# Allegro board D1S_NEFU_V1_0.brd
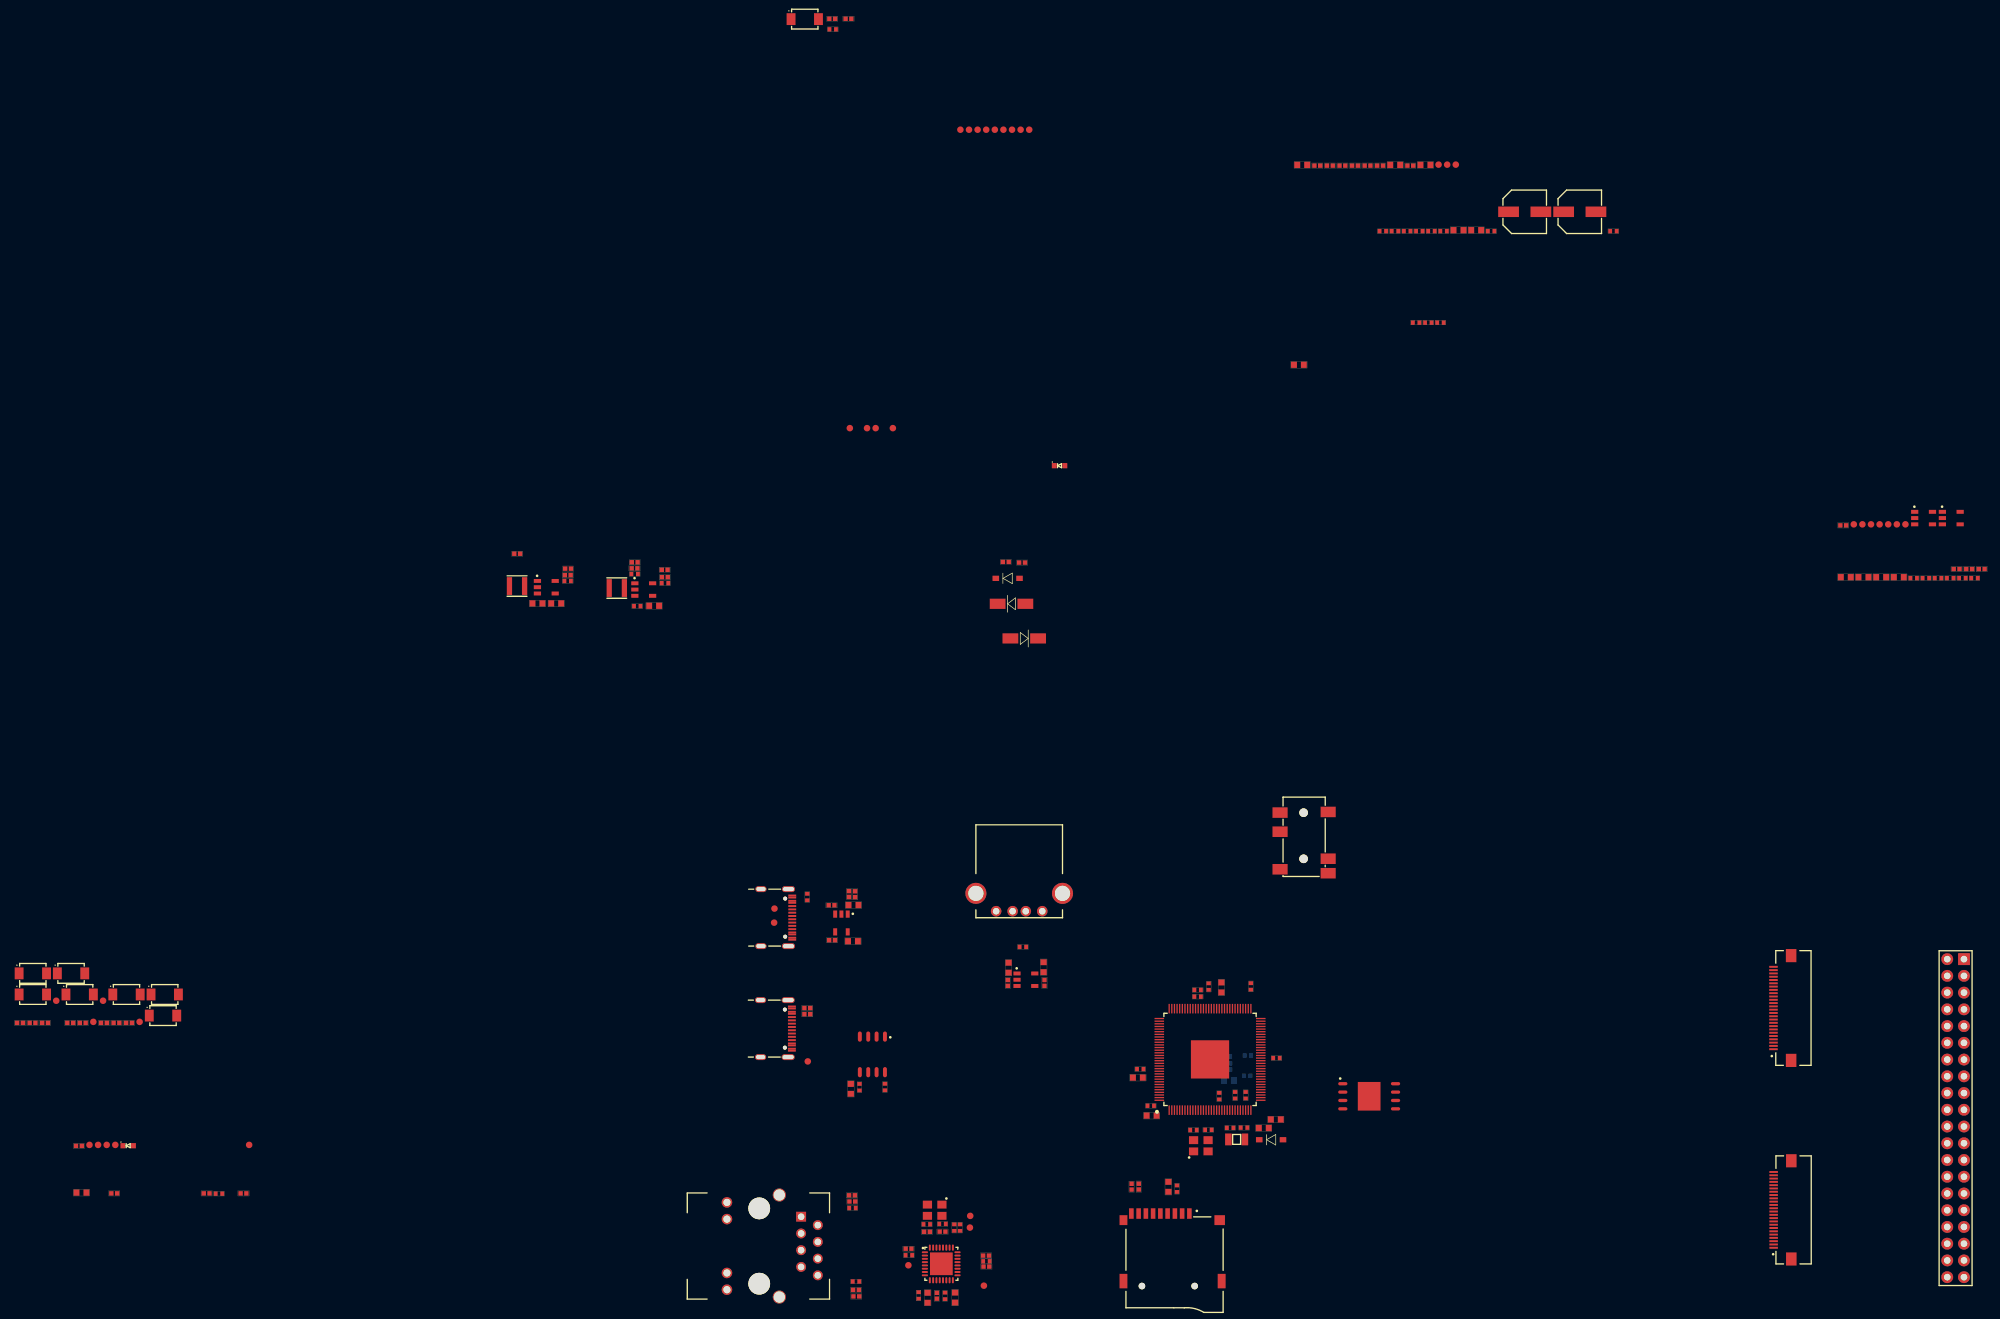
[diagram p0: board, top side]
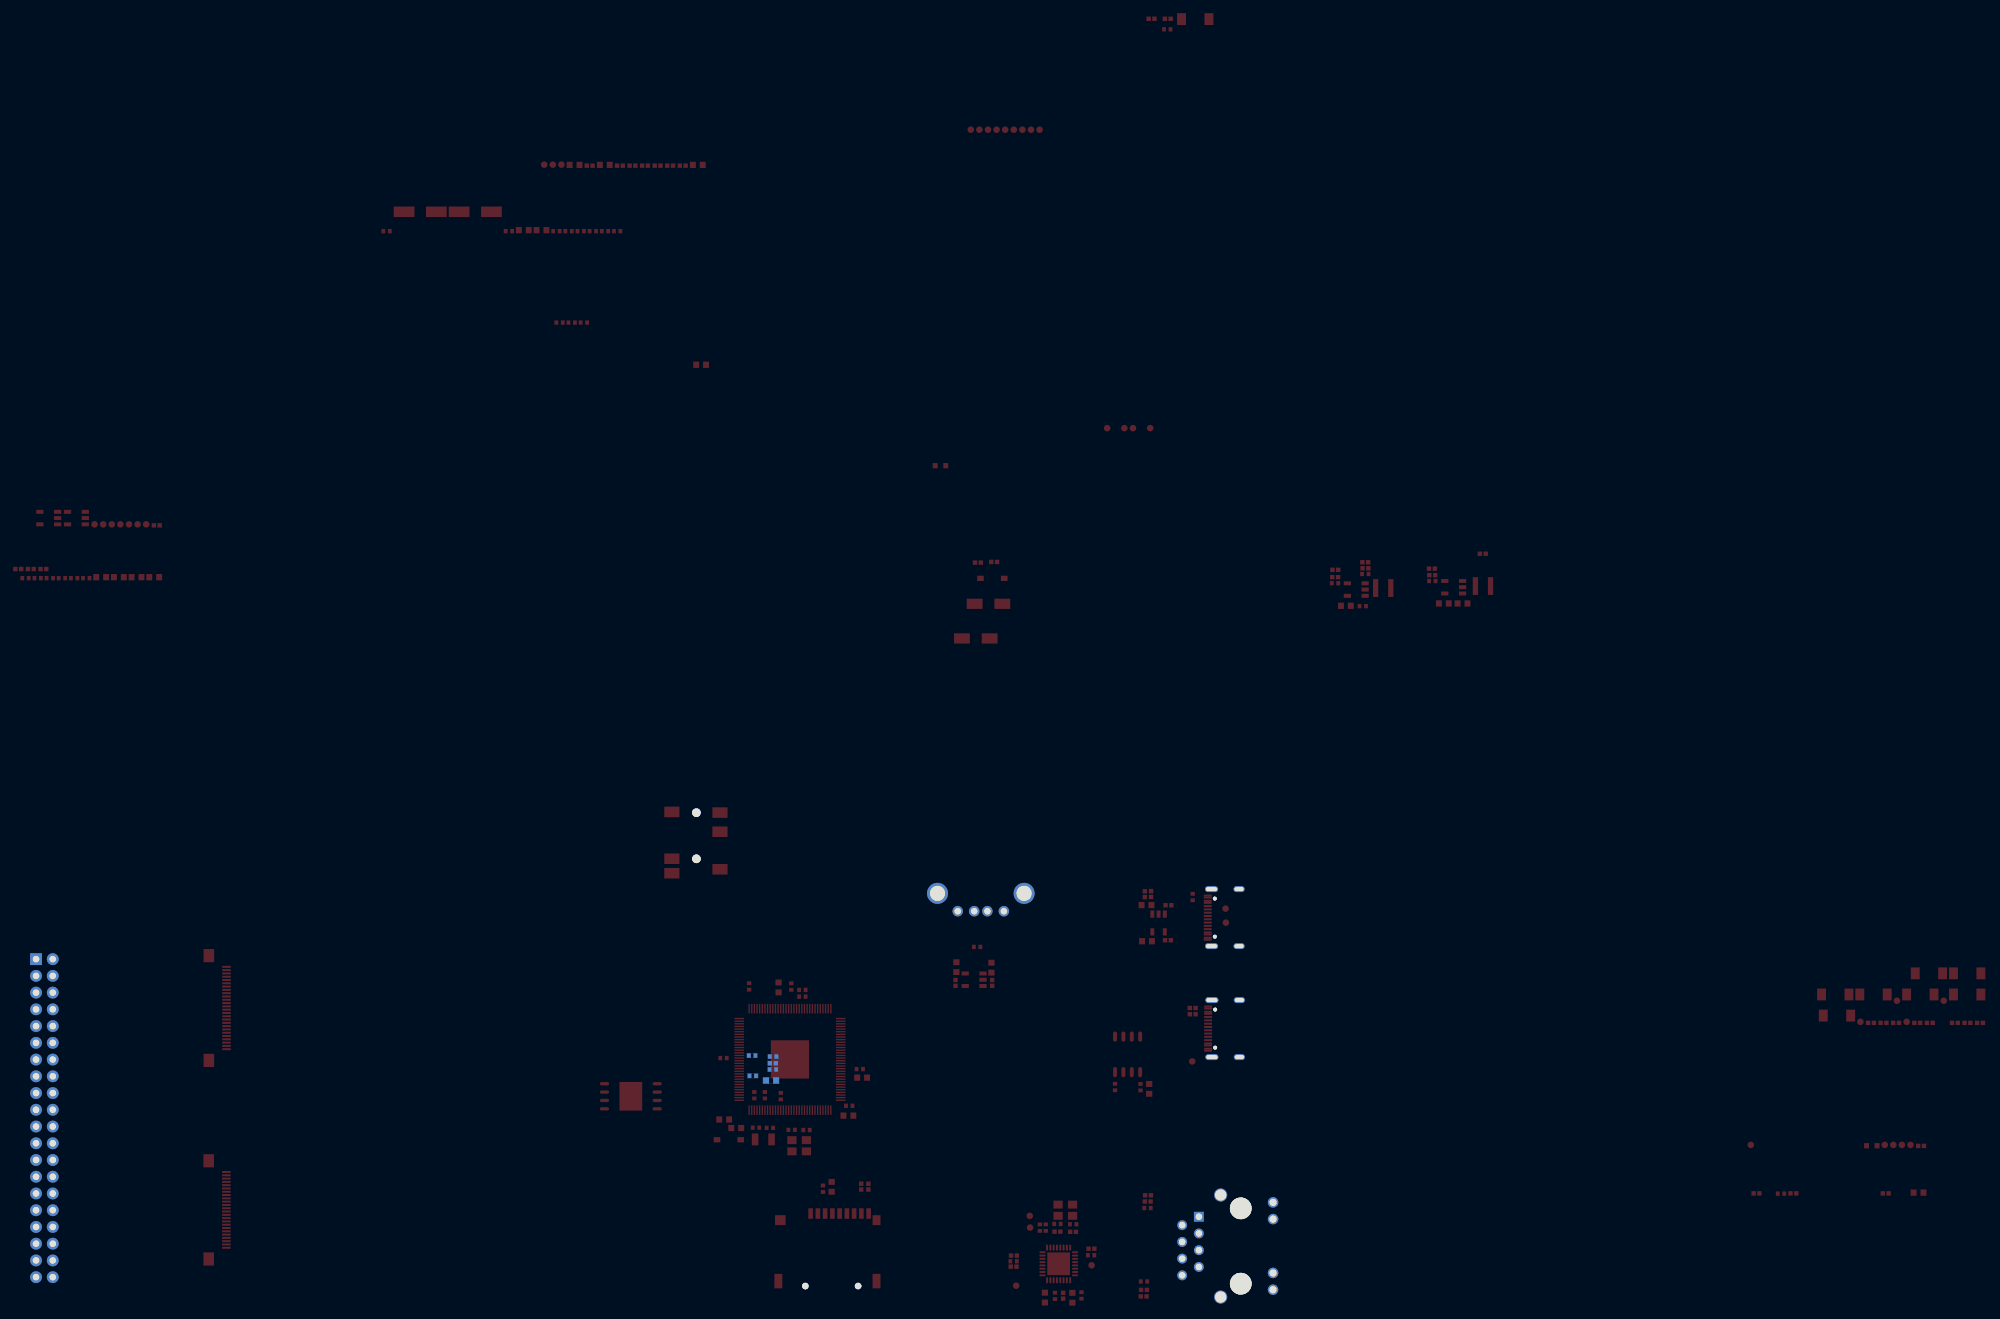
[diagram p1: board, bottom side, seen from below]

No outline. copper layers: TOP, ART02, ART03, BOTTOM. Coordinates in mm from the lowest, leftmost part position.

## Design rules (mm)
constraint set DEFAULT: min track width 0.127

## Placement (name value [footprint] x y rotation side)
C1  10uF  [C0603]  81.36 105.36 180 top
C2  10uF  [C0603]  78.52 105.36 0 top
C3  22pF  [C0402]  83.11 108.76 0 top
C4  10uF  [C0603]  188.73 25.76 0 top
C5  10uF  [C0603]  96.22 105 180 top
C6  10uF  [C0402]  93.66 104.95 0 top
C7  1uF  [C0402]  178.7 46.71 180 top
C8  0.1uF  [C0402]  178.7 45.69 180 top
C9  10uF  [C0603]  182.3 47.09 270 top
C10  2.2uF  [C0402]  180.37 47.22 90 top
C11  10uF  [C0603]  183.45 32.97 180 bottom
C12  2.2uF  [C0402]  186.22 33.68 180 bottom
C13  2.2uF  [C0402]  183.17 34.65 180 bottom
C14  10uF  [C0603]  169.63 33.4 180 top
C15  2.2uF  [C0402]  169.98 34.7 180 top
C16  0.1uF  [C0402]  93.28 109.83 180 top
C17  22pF  [C0402]  97.87 108.43 0 top
C18  2.2nF  [C0402]  184.39 30.73 90 top
C19  0.1uF  [C0402]  186.77 47.24 90 top
C20  0.1uF  [C0402]  186.32 36.75 180 bottom
C21  0.1uF  [C0402]  181.97 30.6 90 top
C22  2.2uF  [C0402]  185.99 30.73 90 top
C23  10uF  [C0603]  190.56 27.05 0 top
C24  2.2uF  [C0402]  183.14 36.6 180 bottom
C25  2.2uF  [C0402]  190.66 36.37 0 top
C26  22pF  [C0402]  185.73 25.81 180 top
C27  15pF  [C0402]  178.06 25.45 0 top
C28  15pF  [C0402]  180.32 25.48 0 top
C29  22pF  [C0402]  183.62 25.78 0 top
C30  1nF  [C0402]  123.32 192.48 0 top
C31  10uF  [C0603]  126.47 59.59 0 top
C32  0.1uF  [C0402]  119.46 60.81 90 top
C33  10uF  [C0603]  126.4 54.1 0 top
C34  10uF  [C0603]  150 50.09 90 top
C35  0.1uF  [C0402]  152.18 53.24 0 top
C36  10uF  [C0603]  155.33 50.16 90 top
C37  0.1uF  [C0402]  131.25 31.98 270 top
C38  10uF  [C0603]  126.07 31.7 270 top
C39  0.1uF  [C0402]  127.39 31.95 270 top
C40  2.2uF  [C0603]  218.28 162 0 top
C41  0.1uF  [C0402]  241.78 161.85 0 top
C42  10uF  [C0603]  213.26 171.91 0 top
C43  0.47uF  [C0603]  220.96 162 0 top
C44  33pF  [C0402]  223.23 161.85 0 top
C45  0.1uF  [C0402]  208.64 161.85 0 top
C46  0.1uF  [C0402]  206.8 161.85 0 top
C47  0.1uF  [C0402]  212.33 161.85 0 top
C48  10uF  [C0603]  208.67 171.91 0 top
C49  2.2uF  [C0603]  194.56 171.91 0 top
C50  0.1uF  [C0402]  210.48 161.85 0 top
C51  100uF-6.3V  [SMD_CAP660]  228.33 164.79 0 top
C52  100uF-6.3V  [SMD_CAP660]  236.68 164.79 0 top
C53  0.1uF  [C0402]  214.17 161.85 0 top
C54  0.1uF  [C0402]  216.02 161.85 0 top
C55  0.1uF  [C0402]  215.54 147.98 0 top
C56  0.1uF  [C0402]  213.69 147.98 0 top
C57  10uF  [C0603]  194.06 141.58 0 top
C58  0.1uF  [C0402]  211.85 147.98 0 top
C59  4.7uF  [C0603]  171.71 27.64 0 top
C60  0.1uF  [C0402]  171.58 29.13 0 top
C61  12pF/NC  [C0402]  139.99 11.2 180 top
C62  12pF/NC  [C0402]  137.6 11.15 180 top
C63  0.1uF  [C0402]  146.64 5.54 0 top
C64  22nF  [C0402]  126.86 2.46 0 top
C65  22nF  [C0402]  126.32 13.61 0 top
C66  0.1uF  [C0402]  142.65 10.64 90 top
C67  0.1uF  [C0402]  134.88 6.45 180 top
C68  4.7uF  [C0603]  137.73 0 270 top
C69  0.1uF  [C0402]  140.37 0.28 270 top
C70  4.7uF  [C0603]  141.89 0.03 270 top
C71  0.1uF  [C0402]  136.35 0.35 270 top
C72  0.1uF  [C0402]  141.77 10.64 90 top
C73  10uF  [C0603]  9.33 15.95 0 top
C74  0.1uF  [C0402]  30.2 15.8 0 top
C75  10uF  [C0603]  174.25 16.83 90 top
C76  0.1uF  [C0402]  175.57 16.55 90 top
C77  0.1uF  [C0402]  287.36 109.2 0 top
C78  0.1uF  [C0402]  289.2 109.2 0 top
C79  10uF  [C0603]  277.05 109.35 0 top
C80  0.1uF  [C0402]  291.04 109.2 0 top
C81  10uF  [C0603]  279.73 109.35 0 top
C82  0.1uF  [C0402]  292.89 109.2 0 top
C83  10uF  [C0603]  282.41 109.35 0 top
C84  0.1uF  [C0402]  294.73 109.2 0 top
C85  10uF  [C0603]  285.09 109.35 0 top
C86  0.1uF  [C0402]  296.58 109.2 0 top
D1  B5819  [SOD123]  189.85 23.98 0 top
D2  B5819  [SOD123]  149.87 109.17 0 top
D3  SS24  [DO-214AC]  150.45 105.31 0 top
D4  LED  [LED0603]  157.74 126.26 0 top
D5  SS24  [DO-214AC]  152.38 100.05 180 top
D6  LED  [LED0603]  16.42 23.07 0 top
J1  TYPEC_16PIN  [TYPEC_SMD_16P]  110.32 57.68 270 top
J2  -  [TYPEA_DIP]  151.62 61.37 180 top
J3  TYPEC_16PIN  [TYPEC_SMD_16P]  110.27 40.84 270 top
J4  -  [PJ-342B]  194.85 76.02 90 top
J5  FPC_26PIN  [FPC_05_26P]  266.07 43.97 90 top
J6  CON40  [PIN40_2_54]  293.71 27.25 270 top
J7  TF_CARD  [TF_SMD]  170.24 1.78 0 top
J8  FPC_24PIN  [FPC_05_24P]  266.1 13.33 90 top
L1  2.2uH  [L3012]  75.42 108 180 top
L2  2.2uH  [L3012]  90.56 107.7 180 top
R1  240R-1%  [R0402]  183.17 35.59 180 bottom
R2  100K  [R0402]  75.45 112.9 180 top
R3  450K-1%  [R0402]  83.12 109.65 180 top
R4  100K-1%  [R0402]  83.17 110.64 0 top
R5  47K  [R0402]  93.28 111.61 0 top
R6  100K-1%  [R0402]  97.85 109.35 180 top
R7  100K  [R0402]  93.25 110.69 180 top
R8  200K-1%  [R0402]  97.82 110.46 0 top
R9  47K  [R0402]  125.71 194.08 0 top
R10  510R  [R0402]  123.25 194.08 0 top
R11  51K  [R0402]  125.79 61.26 90 top
R12  100K  [R0402]  123.22 54.25 180 top
R13  5.1K  [R0402]  123.15 59.56 180 top
R14  100K  [R0402]  126.73 61.24 270 top
R15  51K  [R0402]  149.59 111.66 0 top
R16  100K  [R0402]  155.46 47.78 90 top
R17  5.1K  [R0402]  149.89 47.78 90 top
R18  3.3K  [R0402]  152.05 111.56 0 top
R19  5.1K  [R0402]  119.46 43.97 180 top
R20  5.1K  [R0402]  119.46 43.03 0 top
R21  2K  [R0402]  198.76 171.8 0 top
R22  0R  [R0402]  200.67 171.8 0 top
R23  1M  [R0402]  210.97 171.8 0 top
R24  1K  [R0402]  202.57 171.8 0 top
R25  22R  [R0402]  204.48 171.8 0 top
R26  22R  [R0402]  206.38 171.8 0 top
R27  100K  [R0402]  196.86 171.8 0 top
R28  22R  [R0402]  137.62 10.01 0 top
R29  0R  [R0402]  139.99 10.03 180 top
R30  4.7K  [R0402]  126.25 15.54 180 top
R31  510R  [R0402]  126.3 14.6 0 top
R32  1.5K  [R0402]  146.59 6.4 180 top
R33  4.7K/NC  [R0402]  139.12 0.3 90 top
R34  4.7K  [R0402]  146.64 4.72 0 top
R35  4.7K  [R0402]  126.91 0.2 0 top
R36  510R  [R0402]  126.86 1.19 180 top
R37  2.49K-1%  [R0402]  134.83 7.44 0 top
R38  33R  [R0402]  12.74 41.71 0 top
R39  0R  [R0402]  1.91 41.71 0 top
R40  33R  [R0402]  14.64 41.71 0 top
R41  51K-1%  [R0402]  16.55 41.71 0 top
R42  0R  [R0402]  3.81 41.71 0 top
R43  6.8K-1%  [R0402]  28.32 15.84 0 top
R44  8.2K-1%  [R0402]  33.91 15.84 0 top
R45  10K-1%  [R0402]  8.94 23.04 0 top
R46  11K-1%  [R0402]  14.31 15.84 0 top
R47  13K-1%  [R0402]  9.52 41.71 0 top
R48  10K  [R0402]  168.67 16.86 90 top
R49  1K  [R0402]  169.77 16.87 270 top
R50  1K  [R0402]  7.62 41.71 0 top
R51  5.1K  [R0402]  0 41.71 0 top
R52  4.7K  [R0402]  293.86 110.58 0 top
R53  4.7K  [R0402]  295.77 110.58 0 top
R54  10K  [R0402]  297.67 110.58 0 top
R55  10K  [R0402]  276.66 117.21 0 top
SW1  RESET  [KEY4X3]  119.08 194.03 0 top
SW2  FEL  [KEY4X3]  21.7 42.82 0 top
SW3  KEY  [KEY4X3]  1.95 46.02 0 top
SW4  KEY  [KEY4X3]  16.16 46.02 0 top
SW5  KEY  [KEY4X3]  7.75 49.23 0 top
SW6  KEY  [KEY4X3]  1.95 49.23 0 top
SW7  KEY  [KEY4X3]  21.96 46.02 0 top
SW8  KEY  [KEY4X3]  9.06 46.02 0 top
T1  test  [TP10]  153.14 177.25 0 top
T2  test  [TP10]  150.53 177.25 0 top
T3  test  [TP10]  142.7 177.25 0 top
T4  test  [TP10]  151.84 177.25 0 top
T5  test  [TP10]  144 177.25 0 top
T6  test  [TP10]  145.31 177.25 0 top
T7  test  [TP10]  146.61 177.25 0 top
T8  test  [TP10]  147.92 177.25 0 top
T9  test  [TP10]  149.22 177.25 0 top
T10  test  [TP10]  132.45 131.96 0 top
T11  test  [TP10]  119.54 35.86 270 top
T12  test  [TP10]  129.84 131.96 0 top
T13  test  [TP10]  128.53 131.96 0 top
T14  test  [TP10]  114.49 59.05 270 top
T15  test  [TP10]  125.92 131.96 0 top
T16  test  [TP10]  114.43 56.92 270 top
T17  test  [TP10]  217.87 171.95 0 top
T18  test  [TP10]  216.56 171.95 0 top
T19  test  [TP10]  215.25 171.95 0 top
T20  test  [TP10]  144.19 12.43 0 top
T21  test  [TP10]  146.26 1.83 0 top
T22  test  [TP10]  144.14 10.65 0 top
T23  test  [TP10]  134.81 4.93 0 top
T24  test  [TP10]  5.5 45.07 0 top
T25  test  [TP10]  11.13 41.87 0 top
T26  test  [TP10]  18.15 41.87 0 top
T27  test  [TP10]  14.46 23.2 0 top
T28  test  [TP10]  13.16 23.2 0 top
T29  test  [TP10]  11.85 23.2 0 top
T30  test  [TP10]  10.55 23.2 0 top
T31  test  [TP10]  34.78 23.2 0 top
T32  test  [TP10]  12.61 45.07 0 top
T33  test  [TP10]  278.26 117.36 0 top
T34  test  [TP10]  279.57 117.36 0 top
T35  test  [TP10]  280.87 117.36 0 top
T36  test  [TP10]  282.18 117.36 0 top
T37  test  [TP10]  283.48 117.36 0 top
T38  test  [TP10]  284.79 117.36 0 top
T39  test  [TP10]  286.1 117.36 0 top
U1  SY8089  [SOT23-5]  79.87 107.82 0 top
U2  D1s  [ELQFP128]  180.58 36.17 0 top
U3  SY8089  [SOT23-5]  94.65 107.47 0 top
U4  SY6280  [SOT23-5]  124.65 56.87 270 top
U5  SY6280  [SOT23-5]  152.64 48.26 0 top
U6  CH340N  [SOP-8]  129.34 36.93 270 top
U7  RTL8201F  [QFN32]  139.81 5.16 0 top
U8  -  [HR911105A]  112.17 7.85 90 top
U9  SPI_NAND  [WSON8]  204.72 30.57 0 top
U10  TLV74315  [SOT23-5]  288.85 118.31 0 top
U11  TLV74328  [SOT23-5]  293.05 118.31 0 top
Y1  24M  [CRYSTAL3225]  179.18 23.06 0 top
Y2  32768  [CRYSTAL3215]  184.61 24.03 0 top
Y3  25M/NC  [CRYSTAL3225]  138.79 13.28 180 top

## Library data of the parts
C1-C50 C53-C86 = CAP NP
C51 C52 = CAP POL
D1-D3 D5 = DIODE
D4 D6 = LED
J1 J3 = TYPEC_16PIN
J2 = TYPEA_DIP
J4 = PJ-342E
J5 = FPC_26PIN
J6 = CON40
J7 = TF_CARD
J8 = FPC_24PIN
L1 L2 = INDUCTOR
R1-R55 = R
SW1-SW8 = KEY
T1-T39 = TestPoint
U1 U3 = SY8089
U2 = D1s
U4 U5 = SY6280
U6 = CH340N
U7 = RTL8201F
U8 = HR911105A
U9 = SPI_NAND
U10 U11 = TLV743P
Y1 Y3 = OSC3225
Y2 = CRYSTAL

## Footprints (pads in the part's own frame, mm; a bottom-side part is the same pattern mirrored in y, then rotated)
C0402
  rect 0.579x0.66 smd: 1(-0.49,0) 2(0.49,0)
C0603
  rect 0.899x0.95 smd: 1(-0.749,0) 2(0.749,0)
CRYSTAL3215
  rect 1.001x1.801 smd: 1(-1.25,0) 2(1.25,0)
CRYSTAL3225
  rect 1.4x1.199 smd: 1(-1.1,-0.851) 2(1.1,-0.851) 3(1.1,0.851) 4(-1.1,0.851)
DO-214AC
  rect 2.4x1.549 smd: 1(-2.101,0) 2(2.101,0)
ELQFP128
  rect 0.201x1.45 smd: 1(-6.2,-7.699) 2(-5.799,-7.699) 3(-5.4,-7.699) 4(-5.001,-7.699) 5(-4.6,-7.699) 6(-4.201,-7.699) 7(-3.8,-7.699) 8(-3.401,-7.699) 9(-3,-7.699) 10(-2.601,-7.699) 11(-2.2,-7.699) 12(-1.801,-7.699) 13(-1.4,-7.699) 14(-1.001,-7.699) 15(-0.599,-7.699) 16(-0.201,-7.699) 17(0.201,-7.699) 18(0.599,-7.699) 19(1.001,-7.699) 20(1.4,-7.699) 21(1.801,-7.699) 22(2.2,-7.699) 23(2.601,-7.699) 24(3,-7.699) 25(3.401,-7.699) 26(3.8,-7.699) 27(4.201,-7.699) 28(4.6,-7.699) 29(5.001,-7.699) 30(5.4,-7.699) 31(5.799,-7.699) 32(6.2,-7.699) 65(6.2,7.699) 66(5.799,7.699) 67(5.4,7.699) 68(5.001,7.699) 69(4.6,7.699) 70(4.201,7.699) 71(3.8,7.699) 72(3.401,7.699) 73(3,7.699) 74(2.601,7.699) 75(2.2,7.699) 76(1.801,7.699) 77(1.4,7.699) 78(1.001,7.699) 79(0.599,7.699) 80(0.201,7.699) 81(-0.201,7.699) 82(-0.599,7.699) 83(-1.001,7.699) 84(-1.4,7.699) 85(-1.801,7.699) 86(-2.2,7.699) 87(-2.601,7.699) 88(-3,7.699) 89(-3.401,7.699) 90(-3.8,7.699) 91(-4.201,7.699) 92(-4.6,7.699) 93(-5.001,7.699) 94(-5.4,7.699) 95(-5.799,7.699) 96(-6.2,7.699)
  rect 1.45x0.201 smd: 33(7.699,-6.2) 34(7.699,-5.799) 35(7.699,-5.4) 36(7.699,-5.001) 37(7.699,-4.6) 38(7.699,-4.201) 39(7.699,-3.8) 40(7.699,-3.401) 41(7.699,-3) 42(7.699,-2.601) 43(7.699,-2.2) 44(7.699,-1.801) 45(7.699,-1.4) 46(7.699,-1.001) 47(7.699,-0.599) 48(7.699,-0.201) 49(7.699,0.201) 50(7.699,0.599) 51(7.699,1.001) 52(7.699,1.4) 53(7.699,1.801) 54(7.699,2.2) 55(7.699,2.601) 56(7.699,3) 57(7.699,3.401) 58(7.699,3.8) 59(7.699,4.201) 60(7.699,4.6) 61(7.699,5.001) 62(7.699,5.4) 63(7.699,5.799) 64(7.699,6.2) 97(-7.699,6.2) 98(-7.699,5.799) 99(-7.699,5.4) 100(-7.699,5.001) 101(-7.699,4.6) 102(-7.699,4.201) 103(-7.699,3.8) 104(-7.699,3.401) 105(-7.699,3) 106(-7.699,2.601) 107(-7.699,2.2) 108(-7.699,1.801) 109(-7.699,1.4) 110(-7.699,1.001) 111(-7.699,0.599) 112(-7.699,0.201) 113(-7.699,-0.201) 114(-7.699,-0.599) 115(-7.699,-1.001) 116(-7.699,-1.4) 117(-7.699,-1.801) 118(-7.699,-2.2) 119(-7.699,-2.601) 120(-7.699,-3) 121(-7.699,-3.401) 122(-7.699,-3.8) 123(-7.699,-4.201) 124(-7.699,-4.6) 125(-7.699,-5.001) 126(-7.699,-5.4) 127(-7.699,-5.799) 128(-7.699,-6.2)
  rect 5.799x5.799 smd: 129(0,0)
FPC_05_24P
  rect 0.3x1.3 smd: 1(-5.751,0) 2(-5.25,0) 3(-4.75,0) 4(-4.249,0) 5(-3.749,0) 6(-3.251,0) 7(-2.751,0) 8(-2.25,0) 9(-1.75,0) 10(-1.25,0) 11(-0.749,0) 12(-0.249,0) 13(0.249,0) 14(0.749,0) 15(1.25,0) 16(1.75,0) 17(2.25,0) 18(2.751,0) 19(3.251,0) 20(3.749,0) 21(4.249,0) 22(4.75,0) 23(5.25,0) 24(5.751,0)
  rect 1.999x1.6 smd: 25(-7.45,-2.68) 26(7.45,-2.68)
FPC_05_26P
  rect 0.3x1.3 smd: 1(-6.251,0) 2(-5.751,0) 3(-5.25,0) 4(-4.75,0) 5(-4.249,0) 6(-3.749,0) 7(-3.251,0) 8(-2.751,0) 9(-2.25,0) 10(-1.75,0) 11(-1.25,0) 12(-0.749,0) 13(-0.249,0) 14(0.249,0) 15(0.749,0) 16(1.25,0) 17(1.75,0) 18(2.25,0) 19(2.751,0) 20(3.251,0) 21(3.749,0) 22(4.249,0) 23(4.75,0) 24(5.25,0) 25(5.751,0) 26(6.251,0)
  rect 1.999x1.6 smd: 27(-7.95,-2.68) 28(7.95,-2.68)
HR911105A
  round 3.299 hole 3.299 unplated: (-5.715,0) (5.715,0)
  rect 1.501x1.501 hole 1.001: 1(4.45,-6.355)
  round 1.501 hole 1.001: 2(3.17,-8.89) 3(1.91,-6.355) 4(0.63,-8.89) 5(-0.63,-6.355) 6(-1.91,-8.89) 7(-3.17,-6.355) 8(-4.45,-8.89)
  round 1.6 hole 1.1: 9(6.624,4.9) 10(4.084,4.9) 11(-4.084,4.9) 12(-6.624,4.9)
  round 1.999 hole 1.699: 13(7.744,-3.051) 14(-7.744,-3.051)
KEY4X3
  rect 1.349x1.801 smd: 1(-2.08,0) 2(2.08,0)
L3012
  rect 0.8x2.7 smd: 1(-1.151,0) 2(1.151,0)
LED0603
  rect 0.749x0.8 smd: 1(-0.8,0) 2(0.8,0)
PIN40_2_54
  rect 1.801x1.801 hole 1.001: 1(-24.13,1.27)
  round 1.801 hole 1.001: 2(-21.59,1.27) 3(-19.05,1.27) 4(-16.51,1.27) 5(-13.97,1.27) 6(-11.43,1.27) 7(-8.89,1.27) 8(-6.35,1.27) 9(-3.81,1.27) 10(-1.27,1.27) 11(1.27,1.27) 12(3.81,1.27) 13(6.35,1.27) 14(8.89,1.27) 15(11.43,1.27) 16(13.97,1.27) 17(16.51,1.27) 18(19.05,1.27) 19(21.59,1.27) 20(24.13,1.27) 21(24.13,-1.27) 22(21.59,-1.27) 23(19.05,-1.27) 24(16.51,-1.27) 25(13.97,-1.27) 26(11.43,-1.27) 27(8.89,-1.27) 28(6.35,-1.27) 29(3.81,-1.27) 30(1.27,-1.27) 31(-1.27,-1.27) 32(-3.81,-1.27) 33(-6.35,-1.27) 34(-8.89,-1.27) 35(-11.43,-1.27) 36(-13.97,-1.27) 37(-16.51,-1.27) 38(-19.05,-1.27) 39(-21.59,-1.27) 40(-24.13,-1.27)
PJ-342B
  round 1.3 hole 1.3 unplated: (-9.416,0.076) (-2.416,0.076)
  rect 1.6x2.301 smd: 2(-2.4,3.65) 3(-2.301,-3.65) 4(-5.301,3.65) 5(-9.401,-3.65) 6(-11.001,3.65) 7(-11.6,-3.65)
QFN32
  oval 0.95x0.3 smd: 1(-2.499,1.75) 2(-2.499,1.25) 3(-2.499,0.749) 4(-2.499,0.249) 5(-2.499,-0.249) 6(-2.499,-0.749) 7(-2.499,-1.25) 8(-2.499,-1.75) 17(2.451,-1.75) 18(2.451,-1.25) 19(2.451,-0.749) 20(2.451,-0.249) 21(2.451,0.249) 22(2.451,0.749) 23(2.451,1.25) 24(2.451,1.75)
  oval 0.3x0.95 smd: 9(-1.75,-2.499) 10(-1.25,-2.499) 11(-0.749,-2.499) 12(-0.249,-2.499) 13(0.249,-2.499) 14(0.749,-2.499) 15(1.25,-2.499) 16(1.75,-2.499) 25(1.75,2.451) 26(1.25,2.451) 27(0.749,2.451) 28(0.249,2.451) 29(-0.249,2.451) 30(-0.749,2.451) 31(-1.25,2.451) 32(-1.75,2.451)
  rect 3.449x3.449 smd: 33(0,0)
R0402
  rect 0.671x0.671 smd: 1(-0.439,0) 2(0.439,0)
SMD_CAP660
  rect 3.15x1.6 smd: 1(-2.451,0) 2(2.451,0)
SOD123
  rect 1.001x0.8 smd: 1(-1.801,0) 2(1.801,0)
SOP-8
  oval 1.549x0.599 smd: 1(-2.7,1.905) 2(-2.7,0.635) 3(-2.7,-0.635) 4(-2.7,-1.905) 5(2.7,-1.905) 6(2.7,-0.635) 7(2.7,0.635) 8(2.7,1.905)
SOT23-5
  rect 1.1x0.599 smd: 1(-1.349,0.95) 2(-1.349,0) 3(-1.349,-0.95) 4(1.349,-0.95) 5(1.349,0.95)
TF_SMD
  round 1.001 hole 1.001 unplated: (0,0) (8.001,0)
  rect 0.701x1.6 smd: 1(7.201,11.001) 2(6.101,11.001) 3(5.001,11.001) 4(3.899,11.001) 5(2.799,11.001) 6(1.699,11.001) 7(0.599,11.001) 8(-0.5,11.001) 9(-1.6,11.001)
  rect 1.199x2.2 smd: 10(12.101,0.749) 11(-2.799,0.749)
  rect 1.199x1.501 smd: 12(-2.799,10)
  rect 1.6x1.501 smd: 13(11.801,10)
TP10
  round 1.001 smd: 1(0,0)
TYPEA_DIP
  round 1.6 hole 1.001: 1(-3.5,2.71) 2(-1.001,2.71) 3(1.001,2.71) 4(3.5,2.71)
  round 3.2 hole 2.301: 5(6.571,0) 6(-6.571,0)
TYPEC_SMD_16P
  round 0.599 hole 0.599 unplated: (-2.891,5.791) (2.891,5.791)
  rect 0.3x1.199 smd: A1(-3.35,6.861) A4(-2.55,6.861) A5(-1.25,6.861) A6(-0.249,6.861) A7(0.249,6.861) A8(1.25,6.861) A9(2.55,6.861) A12(3.35,6.861) B1(3.051,6.861) B4(2.25,6.861) B5(1.75,6.861) B6(0.749,6.861) B7(-0.749,6.861) B8(-1.75,6.861) B9(-2.25,6.861) B12(-3.051,6.861)
  oval 0.899x1.999 hole 0.599x1.699: SH1(-4.326,6.289) SH4(4.326,6.289)
  oval 0.899x1.699 hole 0.599x1.4: SH2(-4.326,2.111) SH3(4.326,2.111)
WSON8
  oval 1.4x0.5 smd: 1(-4,1.905) 2(-4,0.635) 3(-4,-0.635) 4(-4,-1.905) 5(4,-1.905) 6(4,-0.635) 7(4,0.635) 8(4,1.905)
  rect 3.449x4.351 smd: 9(0,0)

## Nets
AGND: C42.1 C43.1 R22.2 U2.91
AVCC: C40.2 C49.1 R21.2 R41.2 T18.1(TP) U2.89
AVDD10: C67.1 T23.1(TP) U7.2
DVDD10: C66.1 T22.1(TP) U7.29
GND: C1.2 C2.2 C4.2 C5.2 C6.2 C7.2 C8.2 C9.2 C10.2 C11.2 C12.2 C13.2 C14.2 C15.2 C16.1 C18.2 C19.2 C20.2 C21.2 C22.2 C23.2 C24.2 C25.2 C26.1 C27.1 C28.2 C29.1 C30.2 C31.2 C32.2 C33.2 C34.2 C35.2 C36.2 C37.2 C38.2 C39.2 C40.1 C44.1 C46.1 C48.2 C49.2 C50.2 C55.2 C56.2 C57.2 C58.2 C59.2 C60.2 C61.1 C62.2 C63.2 C64.2 C65.2 C66.2 C67.2 C68.2 C69.2 C70.2 C71.2 C72.2 C73.2 C74.2 C75.2 C76.2 C77.2 C78.2 C79.2 C80.2 C81.2 C82.2 C83.2 C84.2 C85.2 C86.2 D4.1(CATHODE) D6.1(CATHODE) J1.A1 J1.A12 J1.B1 J1.B12 J1.SH1 J1.SH2 J1.SH3 J1.SH4 J2.4 J2.5 J2.6 J3.A1 J3.A12 J3.B1 J3.B12 J3.SH1 J3.SH2 J3.SH3 J3.SH4 J4.3 J5.1 J5.3 J5.6 J5.9 J5.12 J5.15 J5.18 J5.27 J5.28(SH#28) J6.28 J6.29 J6.30 J6.31 J6.32 J6.33 J6.34 J6.37 J6.38 J7.6(VSS) J7.10 J7.11 J7.12 J7.13 J8.1 J8.10 J8.23 J8.25 J8.26(SH#26) R1.2 R4.2 R7.1 R8.2 R12.2 R13.2 R14.2 R17.2 R19.1 R20.2 R22.1 R25.2 R26.2 R27.2 R29.1 R33.1 R35.2 R36.1 R37.1 R55.2 SW1.1 SW2.2(4) SW3.2(4) SW4.2(4) SW5.2(4) SW6.2(4) SW7.2(4) SW8.2(4) U1.2 U2.129 U3.2 U4.2 U5.2 U6.3 U7.33 U8.8 U8.13 U8.14 U9.4 U9.9 U10.2 U11.2 Y1.2 Y1.4 Y3.2 Y3.4
VCC-TVIN: U2.107
VCC-TVOUT: U2.77
VCC_0V9: C6.1 C9.1 C10.1 C11.1 C12.1 C13.1 C14.1 C15.1 C17.2 L2.2 R6.1 T6.1(TP) U2.46 U2.51 U2.81 U2.116 U2.117
VCC_1V8: C18.1 C19.1 C20.1 C21.1 C55.1 T3.1(TP) U2.20 U2.26 U2.28 U2.50 U2.65
VCC_3V3: C2.1 C3.2 C7.1 C8.1 C56.1 C59.1 C60.1 C68.1 C69.1 C70.1 C71.1 C72.1 C73.1 C74.1 C75.1 C76.1 C78.1 C79.1 C80.1 C81.1 C82.1 D1.2 J6.35 J6.36 J7.4 J8.2 J8.14 L1.2 R3.1 R5.2 R9.2 R15.1 R23.1 R30.1 R32.1 R34.2 R48.1 R51.2 R52.1 R53.1 R54.1 T2.1(TP) U2.34(VCC-PE) U2.66 U2.83 U2.128 U7.7 U7.14 U7.30 U8.9 U9.8 U10.1 U10.3 U11.1 U11.3
VCC_5V: C1.1 C5.1 C33.1 C36.1 C57.1 C58.1 D3.1(K) D5.1(K) J6.39 J6.40 R2.2 R16.2 R18.1 T1.1(TP) U1.4 U3.4 U4.5 U5.5
VCC_5V5: J5.25 J5.26
VCC_DRAM: C22.1 C23.1 C24.1 C25.1 T4.1(TP) U2.30 U2.48 U2.49
VCC_USB_DBG: C38.1 C39.1 D5.2 J3.A4 J3.A9 J3.B4 J3.B9(VBUS#B9) T11.1(TP) U6.5(VCC)
VCC_USB_OTG: C31.1 C32.1 D3.2 J1.A4 J1.A9 J1.B4 J1.B9(VBUS#B9) R11.1 T10.1(TP) U4.1(OUT)
CAM_AVDD_2V8: C85.1 C86.1 J8.21 T38.1(TP) U11.5(OUT)
CAM_D0: J8.6 T39.1(TP) U2.43
CAM_D1: J8.4 U2.42
CAM_D2: J8.3 U2.41
CAM_D3: J8.5 U2.40
CAM_D4: J8.7 U2.39
CAM_D5: J8.9 U2.38
CAM_D6: J8.11 U2.37
CAM_D7: J8.13 U2.36
CAM_DVDD_1V5: C83.1 C84.1 J8.15 T36.1(TP) U10.5(OUT)
CAM_HSYNC: J8.16 T37.1(TP) U2.44
CAM_MCLK: J8.12 T33.1(TP) U2.33
CAM_PCLK: J8.8 T34.1(TP) U2.35
CAM_PWDN: J8.17 R55.1
CAM_RESET: C77.1 J8.19 R54.2
CAM_VSYNC: J8.18 T35.1(TP) U2.45
CLK_24M_OUT: T9.1(TP) U2.21
CTP_INT: J5.24 J6.21 U2.54
CTP_RESET: J5.21 J6.20 U2.76
DXIN: C27.2 U2.23 Y1.1
DXOUT: C28.1 T5.1(TP) U2.22 Y1.3
GLED-: R31.2 U8.10
GPADC0: R42.1 T28.1(TP) U2.101
HP_MIC: C41.1 C44.2 J4.2 R21.1
HPOUTFB: C50.1 U2.100
HPOUTL: C47.2 C51.1 C54.2 U2.99
HPOUTR: C45.2 C52.1 C53.2 U2.98
HPVCC: C48.1 T17.1(TP) U2.97
LCD_BL: J5.20 J6.23 U2.52
LED_ACT/PHY0: R30.2 R31.1 U7.24
LED_LINK/PHY1: R35.1 U7.25 U8.12
MICIN3N: C46.2 U2.88
MICIN3P: C41.2 U2.87
MIPI_CKN: J5.13 J6.6 U2.60
MIPI_CKP: J5.14 J6.5 U2.59
MIPI_DN0: J5.10 J6.2 U2.56
MIPI_DN1: J5.16 J6.4 U2.58
MIPI_DN2: J5.7 J6.8 U2.62
MIPI_DN3: J5.4 J6.10 U2.64
MIPI_DP0: J5.11 J6.1 U2.55
MIPI_DP1: J5.17 J6.3 U2.57
MIPI_DP2: J5.8 J6.7 U2.61
MIPI_DP3: J5.5 J6.9 U2.63
MIPI_RESET: J5.2 J6.22 U2.53
PB2: R12.1 T13.1(TP) U2.86 U4.4
PB3: R11.2 R14.1 T15.1(TP) U2.85
PB4: D2.2 R15.2 T12.1(TP) U2.84
PB5: R50.1 U2.82
PD14: J6.15 U2.71
PD15: J6.16 U2.72
PD16: J6.17 U2.73
PD17: J6.18 U2.74
PD18: J6.19 U2.75
PG6: J6.26 U2.1
PG7: J6.27 U2.2
PG8: R24.2 T19.1(TP) U2.3
PG9: R51.1 SW8.1 U2.4
PHY_MDC: U2.126 U7.22
PHY_MDIO: R32.2 U2.127 U7.23
PHY_RESET: C63.1 R34.1 U2.5 U7.21
RESET: C30.1 R9.1 R10.2 T8.1(TP) U2.27
RMII_25M_OUT: R28.1 U2.6
RMII_CRS_DV: U2.120 U7.26
RMII_RXD0: U2.118 U7.9
RMII_RXD1: U2.119 U7.10
RMII_RXER: U2.125 U7.28
RMII_TXCK: T21.1(TP) U2.121 U7.15
RMII_TXD0: U2.123 U7.16
RMII_TXD1: U2.122 U7.17
RMII_TXEN: U2.124 U7.20(TXEN)
RX+: U7.5 U8.3
RX-: U7.6 U8.6
RXD3/CLK_CTL: R33.2 U7.12
SDC0_CD: R48.2 R49.1 T29.1(TP) U2.13
SDC0_CLK: J7.5 R38.1 T30.1(TP)
SDC0_CMD: J7.3 T31.1(TP) U2.10
SDC0_D0: J7.7 T32.1(TP) U2.8
SDC0_D1: J7.8 U2.7
SDC0_D2: J7.1 U2.12
SDC0_D3: J7.2 U2.11
SPI0_CLK: R40.2 T27.1(TP) U9.6
SPI0_CS0: T24.1(TP) U2.18 U9.1
SPI0_HOLD: U2.14 U9.7
SPI0_MISO: R39.1 T26.1(TP) U2.16 U9.2
SPI0_MOSI: T25.1(TP) U2.17 U9.5
SPI0_WP: U2.15 U9.3(WP#)
SPI1_CLK: J6.12 U2.68
SPI1_CS: J6.11 U2.67
SPI1_MISO: J6.14 U2.69
SPI1_MOSI: J6.13 U2.70
TVIN-VRN: U2.111
TVIN-VRP: U2.110
TWI2_SCK: J5.23 J6.24 J8.20 R52.2 U2.32
TWI2_SDA: J5.22 J6.25 J8.22 R53.2 U2.31
TX+: U7.3 U8.1
TX-: U7.4 U8.2(TD-)
UART3_RX: U2.79 U6.6
UART3_TX: U2.80 U6.7
USB_DBG_D+: J3.A6 J3.B6 U6.1
USB_DBG_D-: J3.A7 J3.B7 U6.2
USB_HOST_DM: J2.2 U2.113
USB_HOST_DP: J2.3 U2.112
USB_OTG_CC: D2.1(K) J1.A5 J1.B5
USB_OTG_DM: J1.A7 J1.B7 T16.1(TP) U2.114
USB_OTG_DP: J1.A6 J1.B6 T14.1(TP) U2.115
X32KIN: C29.2 U2.24 Y2.1
X32KOUT: C26.2 T7.1(TP) U2.25 Y2.2
XTAL_IN: C61.2 R29.2 U7.31 Y3.1
XTAL_OUT: C62.1 R28.2 T20.1(TP) U7.32 Y3.3
YLED-: R36.2 U8.11
N08101: R2.1 U1.1
N08124: C3.1 R3.2 R4.1 U1.5
N08728: C17.1 R6.2 R8.1 U3.5
N12617: C4.1 D1.1(K) U2.29
N16899: R10.1 SW1.2(4)
N26563: C16.2 R5.1 R7.2 U3.1
N61488: R13.1 U4.3
N66217: D4.2 R18.2
N67476: C37.1 U6.8
N69520: J3.A5 R19.2
N69524: J3.B5 R20.1
N077333: L1.1 U1.3(LX)
N085963: L2.1 U3.3(LX)
N90565: C52.2 J4.4
N90569: C51.2 J4.5 R27.1
N90815: J4.7 R23.2 R24.1
N91323: C54.1 R26.1
N91327: C53.1 R25.1
N91892: C45.1 U2.95
N91896: C47.1 U2.96
N93357: C43.2 U2.92
N93369: C42.2 U2.90
N96641: C34.1 C35.1 J2.1(VBUS) U5.1(OUT)
N96683: R16.1 U5.4
N96687: R17.1 U5.3
N101393: R40.1 U2.19
N101788: R38.2 U2.9
N102326: J7.9 R49.2
N128821: R37.2 U7.1
N128847: C64.1 U8.5
N128859: C65.1 U8.4
N164843: R41.1 R42.2 R43.1
N164941: R43.2 R44.1 SW4.1
N164949: R44.2 R45.1 SW3.1
N164957: R45.2 R46.1 SW5.1
N164965: R46.2 R47.1 SW6.1
N164973: R47.2 SW7.1
N193716: D6.2 R50.2
N194574: R39.2 SW2.1
N1015112: R1.1 U2.47

Pads without a net: J1 A8 B8; J3 A8 B8; J4 6; J5 19; J8 24; U2 78 93 94 102 103 104 105 106 108 109; U6 4; U7 8 11 13 18 19 27; U8 7; U10 4; U11 4
